# Altium PCB PCB2.PcbDoc
Units mm, origin at the board's own origin, x right, y up, seen from the top; angles counter-clockwise.
Board outline 420 x 42.62 mm, 2 copper layers (Top Layer, Bottom Layer); 9 components, 42 nets, 99 pads, 0 vias.
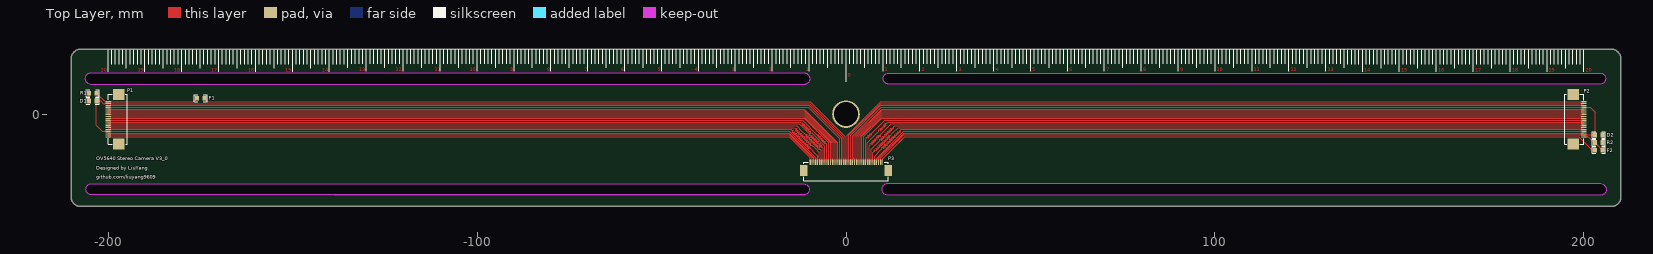
[diagram p0: Top Layer view]
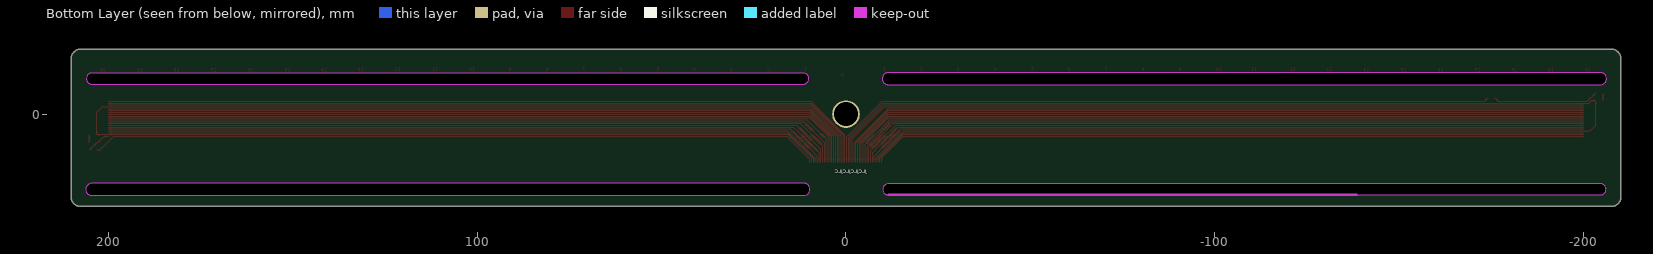
[diagram p1: Bottom Layer view, seen from below]
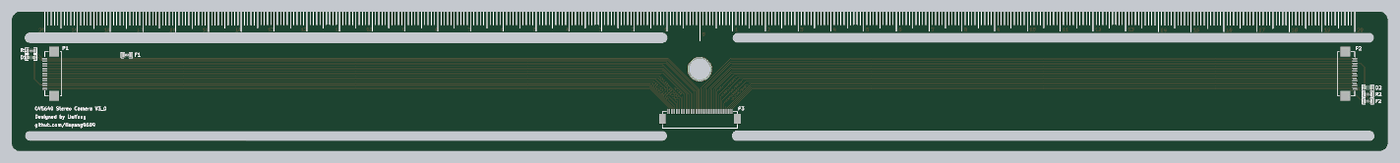
[diagram p2: 3D render of the assembled board from above, using the file's embedded part models]

## Layer stack, top to bottom
Top Solder: solder mask 0.0102, Solder Resist, Dk 3.5
Top Layer: signal copper 0.0356
Dielectric 1: dielectric 0.32, FR-4, Dk 4.8
Bottom Layer: signal copper 0.0356
Bottom Solder: solder mask 0.0102, Solder Resist, Dk 3.5

## Board outline
-210,-22.5 ccw(c-207.5,-22.5) -207.5,-25 207.5,-25 ccw(c207.5,-22.5) 210,-22.5 210,15 ccw(c207.382,15) 207.382,17.618 -207.382,17.618 ccw(c-207.382,15) -210,15
cut-out: -138.465,-22.009 cw(c-138.465,-21.882) -138.465,-21.754 -11.465,-21.754 cw(c-11.465,-21.882) -11.337,-21.882 cw(c-11.465,-21.882) -11.465,-22.009
cut-out: -138.465,-22.009 cw(c-138.465,-21.882) -138.465,-21.754 -11.465,-21.754 cw(c-11.465,-21.882) -11.337,-21.882 cw(c-11.465,-21.882) -11.465,-22.009
cut-out: -204.5,-21.882 cw(c-204.47,-20.371) -204.5,-18.86 -204.5,-18.882 -11.465,-18.882 cw(c-11.465,-20.382) -11.465,-21.882
cut-out: 11.436,-22.009 cw(c11.43,-20.371) 11.07,-18.772 cw(c11.135,-18.882) 11.135,-18.754 204.5,-18.754 cw(c204.5,-18.882) 204.588,-18.79 cw(c204.419,-20.396) 206.034,-20.396 cw(c204.419,-20.396) 204.507,-22.009 cw(c204.5,-21.882) 204.5,-22.009
cut-out: 11.535,8.118 cw(c11.535,9.618) 11.535,11.118 204.5,11.118 204.502,11.135 cw(c204.343,9.627) 204.5,8.118
cut-out: -204.5,7.991 cw(c-204.495,9.627) -204.5,11.262 cw(c-204.5,11.135) -204.437,11.246 -11.165,11.246 cw(c-11.165,11.118) -11.063,11.195 cw(c-11.465,9.618) -9.837,9.618 cw(c-11.465,9.618) -11.192,8.014 cw(c-11.265,8.118) -11.265,7.991 -204.5,7.991 cw(c-204.5,8.118)

## Design rules (kind name [scope] priority, off if disabled: settings)
Clearance [All] p1: gap=0.2
Length LengthClass2 [InNetClass('Class2')] p1: maxlimit=196 minlimit=195
Length LengthClass4 [InNetClass('Class4')] p2: maxlimit=209 minlimit=208
Length LengthClass3 [InNetClass('Class3')] p3: maxlimit=207 minlimit=206
Length LengthClass1 [InNetClass('Class1')] p4: maxlimit=206 minlimit=205
PolygonConnect [All] p1: connectstyle=Relief reliefconductorwidth=0.254 reliefentries=4 polygonreliefangle="90 Angle" airgapwidth=0.254
RoutingVias [All] p1: holewidth=0.6 width=1 viastyle="Through Hole" minholewidth=0.711 minwidth=1.27 maxholewidth=0.711 maxwidth=1.27
SolderMaskExpansion [All] p1: expansion=0.102
Width [All] p1: maxlimit=0.508 minlimit=0.127 preferedwidth=0.152
30 further rules are at their usual default settings.

## Classes and differential pairs
net class Class1: LEFT_D0 LEFT_D1 LEFT_D2 LEFT_D3 LEFT_D4 LEFT_D5 LEFT_D6 LEFT_D7 LEFT_HREF LEFT_PCLK LEFT_SYNC LEFT_XCLK
net class Class2: LEFT_SCL LEFT_SDA
net class Class3: RIGHT_D0 RIGHT_D1 RIGHT_D2 RIGHT_D3 RIGHT_D4 RIGHT_D5 RIGHT_D6 RIGHT_D7 RIGHT_HREF RIGHT_PCLK RIGHT_SYNC RIGHT_XCLK
net class Class4: RIGHT_SCL RIGHT_SDA

## Components (designator, comment, footprint, x,y, rotation, side; value= is the part's Value field where it differs from the comment)
D1 "LED0" LED0805绿 -204.165,3.581 r0 top
D2 "LED0" LED0805绿 204.013,-5.639 r180 top
F1 "500mA" R0805 -174.9,4.3 r180 top
F2 "500mA" R0805 204.013,-9.779 r0 top
P1 "Header 20" FPC20Pin -200,3.353 r0 top
P2 "Header 20" FPC20Pin 200,-6.147 r180 top
P3 "Header 20X2" FPC_40pin_05mm 9.8,-13 r180 top locked
R1 "Res2" R0805 -204.14,5.664 r180 top
R2 "Res2" R0805 204.013,-7.696 r0 top

## Footprints (in the part's own frame and the unit in brackets; to place one, negate y for a bottom-side part, rotate by r counter-clockwise, add the part's x,y. Pads: shape width x height; smd on the part's side, far side on the other; paste and mask are expansions set on the pad)
FPC20Pin [mm]
  rect 1.5x0.3 smd: 1(0,0)
  oval 1.5x0.3 smd: 2(0,-0.5) 3(0,-1) 4(0,-1.5) 5(0,-2) 6(0,-2.5) 7(0,-3) 8(0,-3.5) 9(0,-4) 10(0,-4.5) 11(0,-5) 12(0,-5.5) 13(0,-6) 14(0,-6.5) 15(0,-7) 16(0,-7.5) 17(0,-8) 18(0,-8.5) 19(0,-9) 20(0,-9.5)
  rect 3x3 smd: 21(2.9,2) 22(2.9,-11.5)
  silkscreen extent 0,-11.5 5.2,2
FPC_40pin_05mm [mm]
  rect 2x3 smd: 0(-1.7,2.25) 0(21.2,2.25)
  rect 0.3x1.5 smd: 1(0,0) 2(0.5,0) 3(1,0) 4(1.5,0) 5(2,0) 6(2.5,0) 7(3,0) 8(3.5,0) 9(4,0) 10(4.5,0) 11(5,0) 12(5.5,0) 13(6,0) 14(6.5,0) 15(7,0) 16(7.5,0) 17(8,0) 18(8.5,0) 19(9,0) 20(9.5,0) 21(10,0) 22(10.5,0) 23(11,0) 24(11.5,0) 25(12,0) 26(12.5,0) 27(13,0) 28(13.5,0) 29(14,0) 30(14.5,0) 31(15,0) 32(15.5,0) 33(16,0) 34(16.5,0) 35(17,0) 36(17.5,0) 37(18,0) 38(18.5,0) 39(19,0) 40(19.5,0)
  silkscreen extent -1.7,0 21.2,5
LED0805绿 [mil]
  rect 40x50 smd: 1(-40,0) 2(40,0)
  silkscreen extent -70,-35 70,35, body extent -40,-25 40,24, height 43
R0805 [mil]
  rect 40x50 smd: 1(-40,0) 2(40,0)
  silkscreen extent -70,-35 70,35, body extent -39,-25 39,25, height 22

## Part data
D1 D2: "Typical INFRARED GaAs LED"
F1 F2: library part "Fuse 1", "Fuse"
P1 P2: "Header, 20-Pin"
P3: "Header, 20-Pin, Dual row"
R1 R2: "Resistor"

## Free pads (board coordinates)
  round 7.5 hole 6.5: 0(0,0)

## Nets (pads, with @x,y where several pads share a name; then routed paths per layer and width w, separated by ;. In a path a pad name is that pad's centre, name@x,y a point inside that pad or via, vN(x,y) a via of type N, cw(c..) or ccw(c..) an arc to the next point about the centre after c; other vN are vias at no path point)
LEFT_D0: P2.16 P3.16 | length 207.7
  Top Layer w0.152: P3.16 2.3,-6.029 9.682,1.353 P2.16
LEFT_D1: P2.15 P3.15 | length 207
  Top Layer w0.152: P3.15 2.8,-6.027 9.68,0.853 P2.15
LEFT_D2: P2.14 P3.14 | length 206.3
  Top Layer w0.152: P3.14 3.3,-6.025 9.678,0.353 P2.14
LEFT_D3: P2.13 P3.13 | length 205.6
  Top Layer w0.152: P3.13 3.8,-6.024 9.677,-0.147 P2.13
LEFT_D4: P2.12 P3.12 | length 204.9
  Top Layer w0.152: P3.12 4.3,-6.022 9.675,-0.647 P2.12
LEFT_D5: P2.11 P3.11 | length 204.2
  Top Layer w0.152: P3.11 4.8,-6.02 9.674,-1.147 P2.11
LEFT_D6: P2.10 P3.10 | length 205.2
  Top Layer w0.152: P3.10 5.3,-6.841 5.512,-6.629 5.544,-6.597 5.544,-6.446 5.515,-6.417 5.515,-6.267 5.58,-6.202 5.731,-6.202 5.835,-6.306 5.939,-6.41 6.09,-6.41 6.155,-6.346 6.155,-6.195 6.051,-6.091 5.946,-5.986 5.946,-5.836 6.011,-5.771 6.162,-5.771 6.266,-5.875 6.37,-5.979 6.521,-5.979 6.586,-5.915 6.586,-5.764 6.482,-5.66 6.377,-5.555 6.377,-5.404 6.442,-5.34 6.593,-5.34 6.697,-5.444 6.801,-5.548 6.952,-5.548 7.017,-5.484 7.017,-5.333 6.988,-5.304 6.988,-5.153 7.887,-4.254 10.494,-1.647 P2.10
LEFT_D7: P2.9 P3.9 | length 205.1
  Top Layer w0.152: P3.9 5.8,-7.764 8.319,-5.245 8.939,-4.624 8.939,-4.474 8.91,-4.445 8.91,-4.294 8.975,-4.229 9.126,-4.229 9.23,-4.333 9.334,-4.438 9.485,-4.438 9.55,-4.373 9.55,-4.222 9.446,-4.118 9.341,-4.014 9.341,-3.863 9.406,-3.798 9.557,-3.798 9.661,-3.902 9.765,-4.007 9.916,-4.007 9.981,-3.942 9.981,-3.791 9.877,-3.687 9.773,-3.583 9.773,-3.432 9.837,-3.367 9.988,-3.367 10.092,-3.471 10.196,-3.576 10.347,-3.576 10.412,-3.511 10.412,-3.36 10.308,-3.256 10.204,-3.152 10.204,-3.001 10.268,-2.936 10.419,-2.936 10.523,-3.04 10.627,-3.145 10.778,-3.145 10.843,-3.08 10.843,-2.929 10.739,-2.825 10.635,-2.721 10.635,-2.57 10.699,-2.505 10.85,-2.505 10.879,-2.534 11.03,-2.534 11.17,-2.394 11.278,-2.286 11.417,-2.147 P2.9
LEFT_GND: D2.2 P2.2 P2.17 P3.2 P3.17 | length 415.6
  Top Layer w0.254: P3.17 1.8,-5.838 9.491,1.853 P2.17 201.652,1.853 202.989,0.516 202.989,-5.647 P2.2 15.691,-5.647 9.323,-12.015 9.323,-13 P3.2
LEFT_HREF: P2.6 P3.6 | length 205.2
  Top Layer w0.152: P3.6 7.3,-10.48 7.709,-10.071 7.741,-10.039 7.741,-9.888 7.712,-9.859 7.712,-9.708 7.777,-9.644 7.928,-9.644 8.032,-9.748 8.136,-9.852 8.287,-9.852 8.352,-9.787 8.352,-9.636 8.248,-9.532 8.144,-9.428 8.144,-9.277 8.208,-9.213 8.359,-9.213 8.463,-9.317 8.567,-9.421 8.718,-9.421 8.783,-9.356 8.783,-9.205 8.679,-9.101 8.575,-8.997 8.575,-8.846 8.639,-8.782 8.79,-8.782 8.894,-8.886 8.998,-8.99 9.149,-8.99 9.214,-8.925 9.214,-8.774 9.11,-8.67 9.006,-8.566 9.006,-8.415 9.07,-8.35 9.221,-8.35 9.325,-8.455 9.43,-8.559 9.58,-8.559 9.645,-8.494 9.645,-8.343 9.541,-8.239 9.437,-8.135 9.437,-7.984 9.501,-7.919 9.652,-7.919 9.756,-8.024 9.861,-8.128 10.011,-8.128 10.076,-8.063 10.076,-7.912 9.972,-7.808 9.868,-7.704 9.868,-7.553 9.932,-7.488 10.083,-7.488 10.187,-7.593 10.292,-7.697 10.442,-7.697 10.507,-7.632 10.507,-7.481 10.403,-7.377 10.299,-7.273 10.299,-7.122 10.363,-7.057 10.514,-7.057 10.619,-7.161 10.723,-7.266 10.874,-7.266 10.938,-7.201 10.938,-7.05 10.834,-6.946 10.73,-6.842 10.73,-6.691 10.795,-6.626 10.945,-6.626 11.05,-6.73 11.154,-6.835 11.305,-6.835 11.369,-6.77 11.369,-6.619 11.265,-6.515 11.161,-6.411 11.161,-6.26 11.226,-6.195 11.376,-6.195 11.481,-6.299 11.585,-6.404 11.736,-6.404 11.8,-6.339 11.8,-6.188 11.696,-6.084 11.592,-5.98 11.592,-5.829 11.657,-5.764 11.807,-5.764 11.836,-5.793 11.987,-5.793 12.687,-5.093 14.133,-3.647 P2.6
LEFT_NC1: P2.18 P3.18 | length 209.3
  Top Layer w0.152: P3.18 1.3,-5.767 9.421,2.353 P2.18
LEFT_NC2: P2.19 P3.19 | length 210
  Top Layer w0.152: P3.19 0.8,-5.769 9.422,2.853 P2.19
LEFT_NC3: P2.20 P3.20 | length 210.7
  Top Layer w0.152: P3.20 0.3,-5.771 9.424,3.353 P2.20
LEFT_PCLK: P2.7 P3.7 | length 205.3
  Top Layer w0.152: P3.7 6.8,-9.583 8.395,-7.988 9.183,-7.2 9.183,-7.049 9.154,-7.021 9.154,-6.87 9.219,-6.805 9.369,-6.805 9.474,-6.909 9.578,-7.014 9.729,-7.014 9.793,-6.949 9.793,-6.798 9.689,-6.694 9.585,-6.59 9.585,-6.439 9.65,-6.374 9.801,-6.374 9.905,-6.478 10.009,-6.582 10.16,-6.582 10.224,-6.518 10.224,-6.367 10.12,-6.263 10.016,-6.159 10.016,-6.008 10.081,-5.943 10.232,-5.943 10.336,-6.047 10.44,-6.151 10.591,-6.151 10.655,-6.087 10.655,-5.936 10.551,-5.832 10.447,-5.728 10.447,-5.577 10.512,-5.512 10.663,-5.512 10.767,-5.616 10.871,-5.72 11.022,-5.72 11.086,-5.656 11.086,-5.505 10.982,-5.401 10.878,-5.297 10.878,-5.146 10.943,-5.081 11.094,-5.081 11.198,-5.185 11.302,-5.289 11.453,-5.289 11.518,-5.225 11.518,-5.074 11.413,-4.97 11.309,-4.865 11.309,-4.715 11.374,-4.65 11.525,-4.65 11.629,-4.754 11.733,-4.858 11.884,-4.858 11.949,-4.794 11.949,-4.643 11.844,-4.539 11.74,-4.434 11.74,-4.284 11.805,-4.219 11.956,-4.219 12.06,-4.323 12.164,-4.427 12.315,-4.427 12.38,-4.363 12.38,-4.212 12.275,-4.108 12.171,-4.003 12.171,-3.852 12.236,-3.788 12.387,-3.788 12.491,-3.892 12.595,-3.996 12.746,-3.996 12.811,-3.932 12.811,-3.781 12.782,-3.752 12.782,-3.601 12.814,-3.569 13.236,-3.147 P2.7
LEFT_SCL: P2.3 P3.3 | length 195.1
  Top Layer w0.152: P3.3 8.8,-11.968 15.621,-5.147 P2.3
LEFT_SDA: P2.4 P3.4 | length 195.8
  Top Layer w0.152: P3.4 8.3,-11.969 15.622,-4.647 P2.4
LEFT_SYNC: P2.5 P3.5 | length 205.1
  Top Layer w0.152: P3.5 7.8,-11.352 9.436,-9.715 9.731,-9.421 9.731,-9.27 9.702,-9.241 9.702,-9.09 9.767,-9.025 9.918,-9.025 10.022,-9.13 10.126,-9.234 10.277,-9.234 10.342,-9.169 10.342,-9.018 10.238,-8.914 10.133,-8.81 10.133,-8.659 10.198,-8.594 10.349,-8.594 10.453,-8.699 10.557,-8.803 10.708,-8.803 10.773,-8.738 10.773,-8.587 10.669,-8.483 10.564,-8.379 10.564,-8.228 10.629,-8.163 10.78,-8.163 10.884,-8.268 10.988,-8.372 11.139,-8.372 11.204,-8.307 11.204,-8.156 11.1,-8.052 10.995,-7.948 10.995,-7.797 11.06,-7.732 11.211,-7.732 11.315,-7.836 11.419,-7.941 11.57,-7.941 11.635,-7.876 11.635,-7.725 11.531,-7.621 11.426,-7.517 11.426,-7.366 11.491,-7.301 11.642,-7.301 11.746,-7.405 11.85,-7.51 12.001,-7.51 12.066,-7.445 12.066,-7.294 11.962,-7.19 11.858,-7.086 11.858,-6.935 11.922,-6.87 12.073,-6.87 12.177,-6.974 12.281,-7.079 12.432,-7.079 12.497,-7.014 12.497,-6.863 12.393,-6.759 12.289,-6.655 12.289,-6.504 12.353,-6.439 12.504,-6.439 12.608,-6.543 12.712,-6.647 12.863,-6.647 12.928,-6.583 12.928,-6.432 12.824,-6.328 12.72,-6.224 12.72,-6.073 12.784,-6.008 12.935,-6.008 13.039,-6.112 13.144,-6.216 13.294,-6.216 13.359,-6.152 13.359,-6.001 13.255,-5.897 13.151,-5.793 13.151,-5.642 13.215,-5.577 13.366,-5.577 13.47,-5.681 13.575,-5.785 13.725,-5.785 13.79,-5.721 13.79,-5.57 13.686,-5.466 13.582,-5.361 13.582,-5.211 13.646,-5.146 13.797,-5.146 13.901,-5.25 14.006,-5.354 14.156,-5.354 14.221,-5.29 14.221,-5.139 14.117,-5.035 14.013,-4.93 14.013,-4.78 14.077,-4.715 14.228,-4.715 14.333,-4.819 14.437,-4.923 14.588,-4.923 14.652,-4.859 14.652,-4.708 14.623,-4.679 14.623,-4.528 14.656,-4.496 15.005,-4.147 P2.5
LEFT_VCC: F2.1 P3.1 | length 198.1
  Top Layer w0.254: P3.1 9.8,-12.18 15.879,-6.101 198.591,-6.101 202.269,-9.779 F2.1
LEFT_XCLK: P2.8 P3.8 | length 205
  Top Layer w0.152: P3.8 6.3,-8.584 6.553,-8.331 6.586,-8.299 6.586,-8.148 6.557,-8.119 6.557,-7.968 6.621,-7.904 6.772,-7.904 6.876,-8.008 6.981,-8.112 7.132,-8.112 7.196,-8.047 7.196,-7.897 7.092,-7.792 6.988,-7.688 6.988,-7.537 7.053,-7.473 7.203,-7.473 7.308,-7.577 7.412,-7.681 7.563,-7.681 7.627,-7.616 7.627,-7.466 7.523,-7.361 7.419,-7.257 7.419,-7.106 7.484,-7.042 7.634,-7.042 7.739,-7.146 7.843,-7.25 7.994,-7.25 8.058,-7.185 8.058,-7.034 7.954,-6.93 7.85,-6.826 7.85,-6.675 7.915,-6.611 8.065,-6.611 8.17,-6.715 8.274,-6.819 8.425,-6.819 8.489,-6.754 8.489,-6.603 8.385,-6.499 8.281,-6.395 8.281,-6.244 8.346,-6.18 8.497,-6.18 8.601,-6.284 8.705,-6.388 8.856,-6.388 8.92,-6.323 8.92,-6.172 8.816,-6.068 8.712,-5.964 8.712,-5.813 8.777,-5.748 8.928,-5.748 9.032,-5.853 9.136,-5.957 9.287,-5.957 9.351,-5.892 9.351,-5.741 9.323,-5.713 9.323,-5.562 9.817,-5.067 12.238,-2.647 P2.8
NetD1_1: D1.1 R1.2 | length 2.1
  Top Layer w0.254: D1.1@-205.156,3.607 R1.2
NetD2_1: D2.1 R2.2 | length 2.1
  Top Layer w0.254: R2.2 D2.1
NetF1_2: F1.2 P1.1 R1.1 | length 28.6
  Top Layer w0.254: R1.1 -200.812,3.353 P1.1 -176.863,3.353 F1.2
NetF2_2: F2.2 P2.1 R2.1 | length 6.6
  Top Layer w0.254: P2.1 201.193,-6.147 202.743,-7.696 R2.1 202.997,-7.747 F2.2
RIGHT_D0: P1.16 P3.36 | length 206
  Top Layer w0.152: P1.16 -14.903,-4.147 -14.732,-4.318 -14.689,-4.361 -14.56,-4.361 -14.509,-4.311 -14.38,-4.311 -14.294,-4.397 -14.294,-4.526 -14.409,-4.641 -14.524,-4.756 -14.524,-4.886 -14.437,-4.972 -14.308,-4.972 -14.193,-4.857 -14.078,-4.742 -13.949,-4.742 -13.863,-4.828 -13.863,-4.957 -13.978,-5.072 -14.093,-5.187 -14.093,-5.317 -14.006,-5.403 -13.877,-5.403 -13.762,-5.288 -13.647,-5.173 -13.518,-5.173 -13.432,-5.259 -13.432,-5.388 -13.547,-5.503 -13.662,-5.618 -13.662,-5.748 -13.575,-5.834 -13.446,-5.834 -13.331,-5.719 -13.216,-5.604 -13.087,-5.604 -13.001,-5.69 -13.001,-5.819 -13.116,-5.934 -13.231,-6.049 -13.231,-6.179 -13.144,-6.265 -13.015,-6.265 -12.9,-6.15 -12.785,-6.035 -12.656,-6.035 -12.57,-6.121 -12.57,-6.251 -12.685,-6.365 -12.799,-6.48 -12.799,-6.61 -12.713,-6.696 -12.584,-6.696 -12.469,-6.581 -12.354,-6.466 -12.225,-6.466 -12.139,-6.552 -12.139,-6.682 -12.253,-6.797 -12.368,-6.911 -12.368,-7.041 -12.282,-7.127 -12.153,-7.127 -12.038,-7.012 -11.923,-6.897 -11.794,-6.897 -11.707,-6.983 -11.707,-7.113 -11.822,-7.228 -11.937,-7.343 -11.937,-7.472 -11.851,-7.558 -11.722,-7.558 -11.607,-7.443 -11.492,-7.328 -11.363,-7.328 -11.276,-7.414 -11.276,-7.544 -11.391,-7.659 -11.506,-7.774 -11.506,-7.903 -11.42,-7.989 -11.291,-7.989 -11.176,-7.874 -11.061,-7.759 -10.932,-7.759 -10.845,-7.845 -10.845,-7.975 -10.96,-8.09 -11.075,-8.205 -11.075,-8.334 -10.989,-8.42 -10.86,-8.42 -10.745,-8.305 -10.63,-8.19 -10.501,-8.19 -10.414,-8.276 -10.414,-8.406 -10.529,-8.521 -10.644,-8.636 -10.644,-8.765 -10.558,-8.851 -10.429,-8.851 -10.314,-8.736 -10.199,-8.621 -10.069,-8.621 -9.983,-8.708 -9.983,-8.837 -10.098,-8.952 -10.213,-9.067 -10.213,-9.196 -10.127,-9.282 -9.998,-9.282 -9.883,-9.167 -9.768,-9.052 -9.638,-9.052 -9.552,-9.139 -9.552,-9.268 -9.602,-9.318 -9.602,-9.448 -8.496,-10.554 -7.7,-11.35 P3.36
RIGHT_D1: P1.15 P3.35 | length 206
  Top Layer w0.152: P1.15 -14.057,-3.647 -13.818,-3.886 -13.774,-3.929 -13.645,-3.929 -13.595,-3.879 -13.466,-3.879 -13.379,-3.965 -13.379,-4.095 -13.494,-4.209 -13.609,-4.324 -13.609,-4.454 -13.523,-4.54 -13.394,-4.54 -13.279,-4.425 -13.164,-4.31 -13.035,-4.31 -12.948,-4.396 -12.948,-4.526 -13.063,-4.641 -13.178,-4.755 -13.178,-4.885 -13.092,-4.971 -12.963,-4.971 -12.848,-4.856 -12.733,-4.741 -12.603,-4.741 -12.517,-4.827 -12.517,-4.957 -12.632,-5.072 -12.747,-5.187 -12.747,-5.316 -12.661,-5.402 -12.532,-5.402 -12.417,-5.287 -12.302,-5.172 -12.172,-5.172 -12.086,-5.258 -12.086,-5.388 -12.201,-5.503 -12.316,-5.618 -12.316,-5.747 -12.23,-5.833 -12.101,-5.833 -11.986,-5.718 -11.871,-5.603 -11.741,-5.603 -11.655,-5.689 -11.655,-5.819 -11.77,-5.934 -11.885,-6.049 -11.885,-6.178 -11.799,-6.264 -11.67,-6.264 -11.555,-6.149 -11.44,-6.034 -11.31,-6.034 -11.224,-6.12 -11.224,-6.25 -11.339,-6.365 -11.454,-6.48 -11.454,-6.609 -11.368,-6.695 -11.238,-6.695 -11.124,-6.58 -11.009,-6.465 -10.879,-6.465 -10.793,-6.552 -10.793,-6.681 -10.908,-6.796 -11.023,-6.911 -11.023,-7.04 -10.937,-7.126 -10.807,-7.126 -10.692,-7.011 -10.578,-6.896 -10.448,-6.896 -10.362,-6.983 -10.362,-7.112 -10.477,-7.227 -10.592,-7.342 -10.592,-7.471 -10.506,-7.557 -10.376,-7.557 -10.261,-7.442 -10.146,-7.327 -10.017,-7.327 -9.931,-7.414 -9.931,-7.543 -10.046,-7.658 -10.161,-7.773 -10.161,-7.902 -10.075,-7.988 -9.945,-7.988 -9.83,-7.873 -9.715,-7.758 -9.586,-7.758 -9.5,-7.845 -9.5,-7.974 -9.615,-8.089 -9.73,-8.204 -9.73,-8.333 -9.644,-8.419 -9.514,-8.419 -9.464,-8.369 -9.335,-8.369 -8.534,-9.169 -7.2,-10.504 P3.35
RIGHT_D2: P1.14 P3.34 | length 206
  Top Layer w0.152: P1.14 -13.363,-3.147 -11.925,-4.585 -11.022,-5.488 -10.871,-5.488 -10.843,-5.459 -10.692,-5.459 -10.627,-5.524 -10.627,-5.675 -10.731,-5.779 -10.835,-5.883 -10.835,-6.034 -10.771,-6.098 -10.62,-6.098 -10.516,-5.994 -10.412,-5.89 -10.261,-5.89 -10.196,-5.955 -10.196,-6.106 -10.3,-6.21 -10.404,-6.314 -10.404,-6.465 -10.34,-6.529 -10.189,-6.529 -10.085,-6.425 -9.981,-6.321 -9.83,-6.321 -9.765,-6.386 -9.765,-6.537 -9.869,-6.641 -9.973,-6.745 -9.973,-6.896 -9.909,-6.96 -9.758,-6.96 -9.654,-6.856 -9.55,-6.752 -9.399,-6.752 -9.334,-6.817 -9.334,-6.968 -9.438,-7.072 -9.542,-7.176 -9.542,-7.327 -9.478,-7.392 -9.327,-7.392 -9.223,-7.287 -9.118,-7.183 -8.968,-7.183 -8.903,-7.248 -8.903,-7.399 -9.007,-7.503 -9.111,-7.607 -9.111,-7.758 -9.047,-7.823 -8.896,-7.823 -8.792,-7.718 -8.687,-7.614 -8.537,-7.614 -8.472,-7.679 -8.472,-7.83 -8.576,-7.934 -8.68,-8.038 -8.68,-8.189 -8.616,-8.254 -8.465,-8.254 -8.361,-8.149 -8.256,-8.045 -8.105,-8.045 -8.041,-8.11 -8.041,-8.261 -8.145,-8.365 -8.249,-8.469 -8.249,-8.62 -8.185,-8.685 -8.034,-8.685 -7.929,-8.581 -7.825,-8.476 -7.674,-8.476 -7.61,-8.541 -7.61,-8.692 -7.714,-8.796 -7.818,-8.9 -7.818,-9.051 -7.753,-9.116 -7.603,-9.116 -7.498,-9.012 -7.394,-8.907 -7.243,-8.907 -7.179,-8.972 -7.179,-9.123 -7.283,-9.227 -7.387,-9.331 -7.387,-9.482 -7.322,-9.547 -7.172,-9.547 -7.143,-9.518 -6.992,-9.518 -6.96,-9.55 -6.7,-9.81 P3.34
RIGHT_D3: P1.13 P3.33 | length 206.3
  Top Layer w0.152: P1.13 -12.669,-2.647 -10.109,-5.207 -9.793,-5.523 -9.793,-5.652 -9.844,-5.702 -9.844,-5.832 -9.757,-5.918 -9.628,-5.918 -9.513,-5.803 -9.398,-5.688 -9.269,-5.688 -9.183,-5.774 -9.183,-5.904 -9.298,-6.018 -9.413,-6.133 -9.413,-6.263 -9.326,-6.349 -9.197,-6.349 -9.082,-6.234 -8.967,-6.119 -8.838,-6.119 -8.752,-6.205 -8.752,-6.335 -8.867,-6.45 -8.982,-6.564 -8.982,-6.694 -8.895,-6.78 -8.766,-6.78 -8.651,-6.665 -8.536,-6.55 -8.407,-6.55 -8.321,-6.636 -8.321,-6.766 -8.436,-6.881 -8.551,-6.996 -8.551,-7.125 -8.464,-7.211 -8.335,-7.211 -8.22,-7.096 -8.105,-6.981 -7.976,-6.981 -7.89,-7.067 -7.89,-7.197 -8.005,-7.312 -8.119,-7.427 -8.119,-7.556 -8.033,-7.642 -7.904,-7.642 -7.789,-7.527 -7.674,-7.412 -7.545,-7.412 -7.459,-7.498 -7.459,-7.628 -7.573,-7.743 -7.688,-7.858 -7.688,-7.987 -7.602,-8.073 -7.473,-8.073 -7.358,-7.958 -7.243,-7.843 -7.114,-7.843 -7.027,-7.929 -7.027,-8.059 -7.142,-8.174 -7.257,-8.289 -7.257,-8.418 -7.171,-8.504 -7.042,-8.504 -6.927,-8.389 -6.812,-8.274 -6.683,-8.274 -6.596,-8.361 -6.596,-8.49 -6.711,-8.605 -6.826,-8.72 -6.826,-8.849 -6.74,-8.935 -6.611,-8.935 -6.561,-8.885 -6.431,-8.885 -6.388,-8.928 -6.2,-9.116 P3.33
RIGHT_D4: P1.12 P3.32 | length 206
  Top Layer w0.152: P1.12 -12.255,-2.147 -12.09,-2.311 -12.047,-2.355 -11.918,-2.355 -11.868,-2.304 -11.738,-2.304 -11.652,-2.39 -11.652,-2.52 -11.767,-2.635 -11.882,-2.75 -11.882,-2.879 -11.796,-2.965 -11.667,-2.965 -11.552,-2.85 -11.437,-2.735 -11.307,-2.735 -11.221,-2.821 -11.221,-2.951 -11.336,-3.066 -11.451,-3.181 -11.451,-3.31 -11.365,-3.396 -11.235,-3.396 -11.121,-3.281 -11.006,-3.166 -10.876,-3.166 -10.79,-3.253 -10.79,-3.382 -10.905,-3.497 -11.02,-3.612 -11.02,-3.741 -10.934,-3.827 -10.804,-3.827 -10.689,-3.712 -10.575,-3.597 -10.445,-3.597 -10.359,-3.684 -10.359,-3.813 -10.474,-3.928 -10.589,-4.043 -10.589,-4.172 -10.503,-4.258 -10.373,-4.258 -10.258,-4.143 -10.143,-4.028 -10.014,-4.028 -9.928,-4.115 -9.928,-4.244 -10.043,-4.359 -10.158,-4.474 -10.158,-4.603 -10.072,-4.689 -9.942,-4.689 -9.827,-4.574 -9.712,-4.459 -9.583,-4.459 -9.497,-4.546 -9.497,-4.675 -9.612,-4.79 -9.727,-4.905 -9.727,-5.034 -9.641,-5.12 -9.511,-5.12 -9.461,-5.07 -9.332,-5.07 -9.042,-5.359 -5.7,-8.702 P3.32
RIGHT_D5: P1.11 P3.31 | length 206.2
  Top Layer w0.152: P1.11 -11.764,-1.647 -8.001,-5.41 -7.738,-5.673 -7.609,-5.673 -7.558,-5.623 -7.429,-5.623 -7.343,-5.709 -7.343,-5.839 -7.458,-5.954 -7.573,-6.068 -7.573,-6.198 -7.486,-6.284 -7.357,-6.284 -7.242,-6.169 -7.127,-6.054 -6.998,-6.054 -6.912,-6.14 -6.912,-6.27 -7.027,-6.385 -7.142,-6.5 -7.142,-6.629 -7.055,-6.715 -6.926,-6.715 -6.811,-6.6 -6.696,-6.485 -6.567,-6.485 -6.481,-6.571 -6.481,-6.701 -6.596,-6.816 -6.711,-6.931 -6.711,-7.06 -6.624,-7.146 -6.495,-7.146 -6.38,-7.031 -6.265,-6.916 -6.136,-6.916 -6.05,-7.002 -6.05,-7.132 -6.165,-7.247 -6.279,-7.362 -6.279,-7.491 -6.193,-7.577 -6.064,-7.577 -5.949,-7.462 -5.834,-7.347 -5.705,-7.347 -5.619,-7.433 -5.619,-7.563 -5.733,-7.678 -5.848,-7.793 -5.848,-7.922 -5.762,-8.008 -5.633,-8.008 -5.583,-7.958 -5.453,-7.958 -5.41,-8.001 -5.2,-8.211 P3.31
RIGHT_D6: P1.10 P3.30 | length 203.3
  Top Layer w0.152: P1.10 -11.299,-1.147 -4.7,-7.746 P3.30
RIGHT_D7: P1.9 P3.29 | length 204
  Top Layer w0.152: P1.9 -11.291,-0.647 -4.2,-7.738 P3.29
RIGHT_GND: D1.2 P1.2 P1.17 P3.22 P3.37 | length 419.6
  Top Layer w0.254: P3.37 -8.2,-11.815 -15.368,-4.647 P1.17 -201.525,-4.647 -203.149,-3.023 D1.2 -201.956,3.581 -201.228,2.853 P1.2 -199.977,2.876 -9.886,2.876 -0.7,-6.31 P3.22
RIGHT_HREF: P1.6 P3.26 | length 206.1
  Top Layer w0.152: P1.6 -11.296,0.853 -2.7,-7.743 P3.26
RIGHT_NC1: P1.18 P3.38 | length 195.2
  Top Layer w0.152: P1.18 -15.438,-5.147 -8.7,-11.885 P3.38
RIGHT_NC2: P1.19 P3.39 | length 194.5
  Top Layer w0.152: P1.19 -15.437,-5.647 -9.2,-11.884 P3.39
RIGHT_NC3: P1.20 P3.40 | length 193.8
  Top Layer w0.152: P1.20 -15.435,-6.147 -9.7,-11.882 P3.40
RIGHT_PCLK: P1.7 P3.27 | length 205.4
  Top Layer w0.152: P1.7 -11.294,0.353 -3.2,-7.741 P3.27
RIGHT_SCL: P1.3 P3.23 | length 208.9
  Top Layer w0.152: P1.3 -10.151,2.353 -1.2,-6.598 P3.23
RIGHT_SDA: P1.4 P3.24 | length 208.1
  Top Layer w0.152: P1.4 -10.286,1.853 -1.7,-6.733 P3.24
RIGHT_SYNC: P1.5 P3.25 | length 206.8
  Top Layer w0.152: P1.5 -11.297,1.353 -2.2,-7.745 P3.25
RIGHT_VCC: F1.1 P3.21 | length 184.9
  Top Layer w0.254: F1.1 -172.914,3.33 -9.654,3.33 -0.2,-6.125 P3.21
RIGHT_XCLK: P1.8 P3.28 | length 204.7
  Top Layer w0.152: P1.8 -11.292,-0.147 -3.7,-7.74 P3.28
pads on no net: P1.21 P1.22 P2.21 P2.22 P3.0

## Other copper
Top Layer:
  pour cut-out: -204.5,-21.882 cw(c-204.47,-20.371) -204.5,-18.86 -204.5,-18.882 -11.465,-18.882 cw(c-11.465,-20.382) -11.465,-21.882
  text "13" at -131.965,11.618 h1
  text "12" at -121.965,11.618 h1
  text "11" at -111.465,11.618 h1
  text "10" at -101.965,11.618 h1
  text "9" at -90.965,11.618 h1
  text "8" at -80.965,11.618 h1
  text "7" at -70.965,11.618 h1
  text "6" at -60.965,11.618 h1
  text "5" at -50.965,11.618 h1
  text "4" at -40.965,11.618 h1
  text "3" at -30.965,11.618 h1
  text "2" at -20.965,11.618 h1
  text "1" at -10.965,11.618 h1
  text "1" at 10.535,11.618 h1
  text "2" at 20.535,11.618 h1
  text "3" at 30.535,11.618 h1
  text "4" at 40.535,11.618 h1
  text "5" at 50.535,11.618 h1
  text "6" at 60.535,11.618 h1
  text "7" at 70.535,11.618 h1
  text "8" at 80.535,11.618 h1
  text "9" at 90.535,11.618 h1
  text "10" at 100.535,11.618 h1
  text "11" at 110.535,11.618 h1
  text "12" at 120.535,11.618 h1
  text "13" at 130.535,11.618 h1
  text "20" at -202,11.5 h1
  text "19" at -192,11.5 h1
  text "18" at -182,11.5 h1
  text "17" at -172,11.5 h1
  text "16" at -162,11.5 h1
  text "15" at -152,11.5 h1
  text "14" at -142,11.5 h1
  text "14" at 140.5,11.5 h1
  text "15" at 150.5,11.5 h1
  text "16" at 160.5,11.5 h1
  text "17" at 170.5,11.5 h1
  text "18" at 180.5,11.5 h1
  text "19" at 190.5,11.5 h1
  text "20" at 200.5,11.5 h1
  text "0" at 0.535,10.118 h1

## Silkscreen, mask and mechanical layers (free items; w line width, h text height)
Top Overlay:
  drawing of 434 lines, arcs and shapes, not listed
  text "OV5640 Stereo Camera V3_0" at -203.168,-12.519 h1
  text "Designed by LiuYang" at -203.168,-15.019 h1
  text "github.com/liuyang9609" at -203.168,-17.519 h1
Bottom Overlay:
  text "JLCJLCJLCJLC" at -5.65,-16.05 h1
Mechanical 1:
  pour cut-out: -204.5,-21.882 cw(c-204.47,-20.371) -204.5,-18.86 -204.5,-18.882 -11.465,-18.882 cw(c-11.465,-20.382) -11.465,-21.882
  pour cut-out: -204.5,-21.882 cw(c-204.47,-20.371) -204.5,-18.86 -204.5,-18.882 -11.465,-18.882 cw(c-11.465,-20.382) -11.465,-21.882
  pour cut-out: -204.5,7.991 cw(c-204.495,9.627) -204.5,11.262 cw(c-204.5,11.135) -204.437,11.246 -11.165,11.246 cw(c-11.165,11.118) -11.063,11.195 cw(c-11.465,9.618) -9.837,9.618 cw(c-11.465,9.618) -11.192,8.014 cw(c-11.265,8.118) -11.265,7.991 -204.5,7.991 cw(c-204.5,8.118)
  lines w0.254: -204.5,-18.882 -138.465,-18.882 -11.465,-18.882 cw(c-11.465,-20.382) -11.465,-21.882 -138.465,-21.882 -204.5,-21.882 cw(c-204.47,-20.371) -204.5,-18.86 ; -204.5,11.118 -138.465,11.118 -11.165,11.118 ; -204.5,11.135 ccw(c-204.495,9.627) -204.5,8.118 -138.465,8.118 -11.265,8.118 ; -11.465,8.118 ccw(c-11.465,9.618) -11.465,11.118 ; 11.135,-18.882 139.035,-18.882 204.5,-18.882 ; 11.137,-18.889 ccw(c11.43,-20.371) 11.435,-21.882 139.035,-21.882 204.5,-21.882 ccw(c204.419,-20.396) 204.498,-18.911 ; 204.5,11.118 139.035,11.118 11.535,11.118 ccw(c11.535,9.618) 11.535,8.118 139.035,8.118 204.5,8.118 ccw(c204.343,9.627) 204.502,11.135 ; -210,-22.5 ccw(c-207.5,-22.5) -207.5,-25 207.5,-25 ccw(c207.5,-22.5) 210,-22.5 210,15 ccw(c207.382,15) 207.382,17.618 146.035,17.618 -145.965,17.618 -207.382,17.618 ccw(c-207.382,15) -210,15 -210,-22.5